# EAGLE board hum_sens_test (EAGLE 9.5.0)

Size 11.1 x 11.42 mm. Coordinates in mm from the lower left corner, seen from the top.
Outline: 0,0 11.1,0 11.1,11.42 0,11.42 0,0
Copper layers (1*16): Top 0.035mm / dielectric 1.5mm / Bottom 0.035mm
Design rules "default": minimum track width 6mil, minimum drill 0.35mm, track to track 6mil, track to pad 6mil, pad to pad 6mil, via to via 6mil, smd to smd 6mil, copper to edge 40mil, drill to drill 6mil, minimum pad ring 10mil, minimum via ring 8mil, stop-mask expansion 4mil, vias tented up to drill 0mil, thermal gap 10mil

## Footprints (pad centres in the part's own frame; a part is rotated, then mirrored left to right if it is on the bottom)
HIH6030-021-001 = smd 0.61 x 2.03: 1 0,-4.9; 2 1.27,-4.9; 3 2.54,-4.9; 4 3.81,-4.9; 5 3.81,0; 6 2.54,0; 7 1.27,0; 8 0,0

## Placement (x,y rotation side)
U$1  [HIH6030-021-001]  7.62,7.62 270 top

## Library data of the parts
U$1 = HIH6030-021-001

## Nets
VDD: U$1.8

## Tracks (layer width: path | path; a pad name or v marks a point on that pad's centre or on a via)
(copper drawn outside any net)
  shapes: Top area x2